# Altium PCB top.PcbDoc
Units mil, origin at the board's own origin, x right, y up, seen from the top; angles counter-clockwise.
Board outline 4650 x 4650 mil, 2 copper layers (Top Layer, Bottom Layer); 13 components, 9 nets, 93 pads, 32 vias.
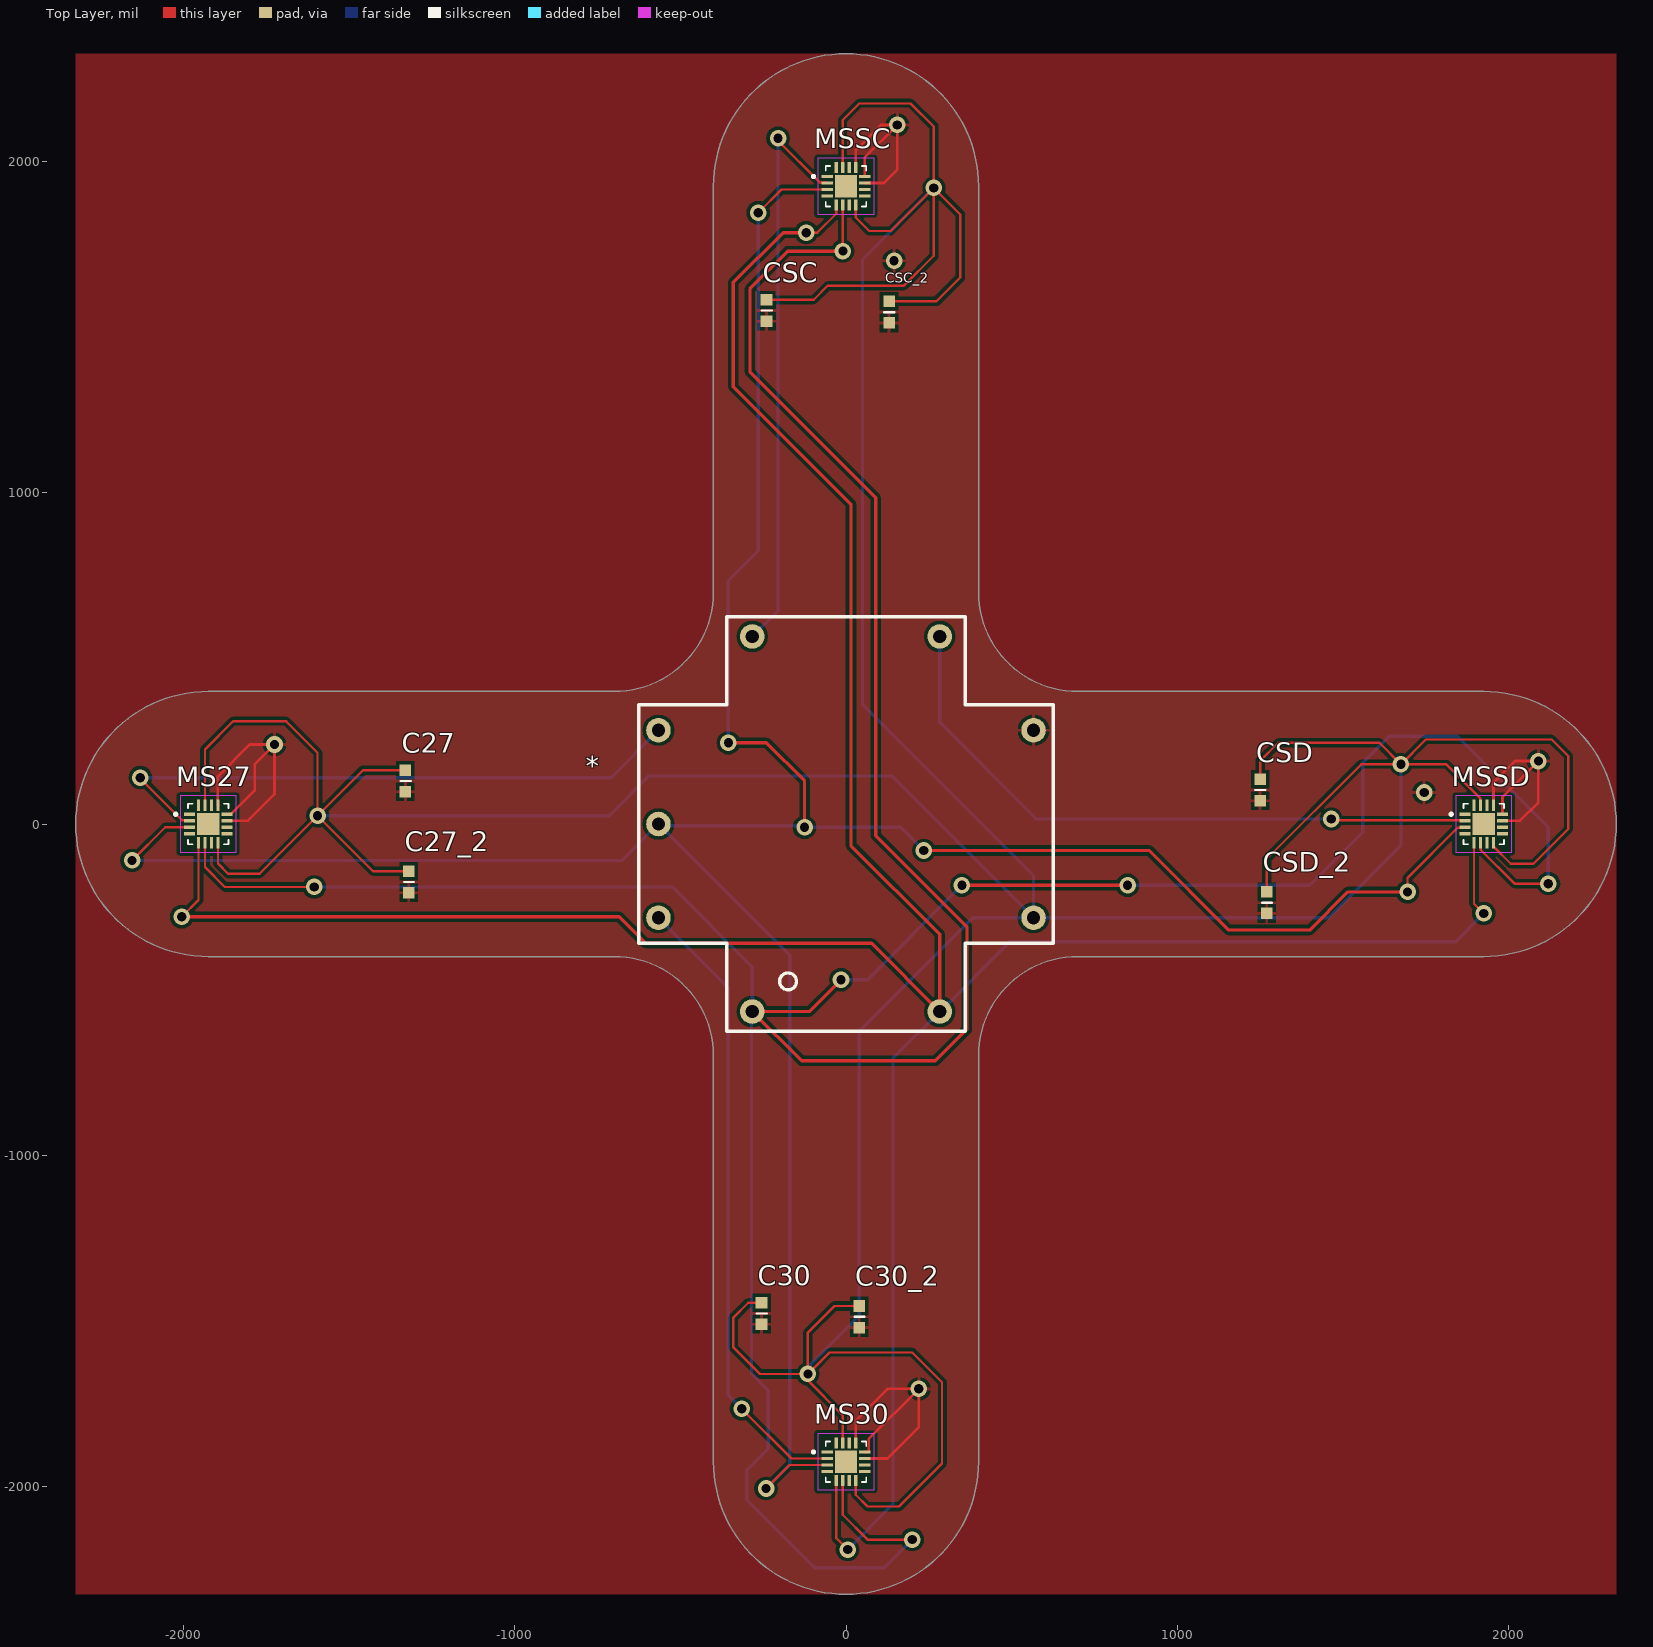
[diagram p0: Top Layer view]
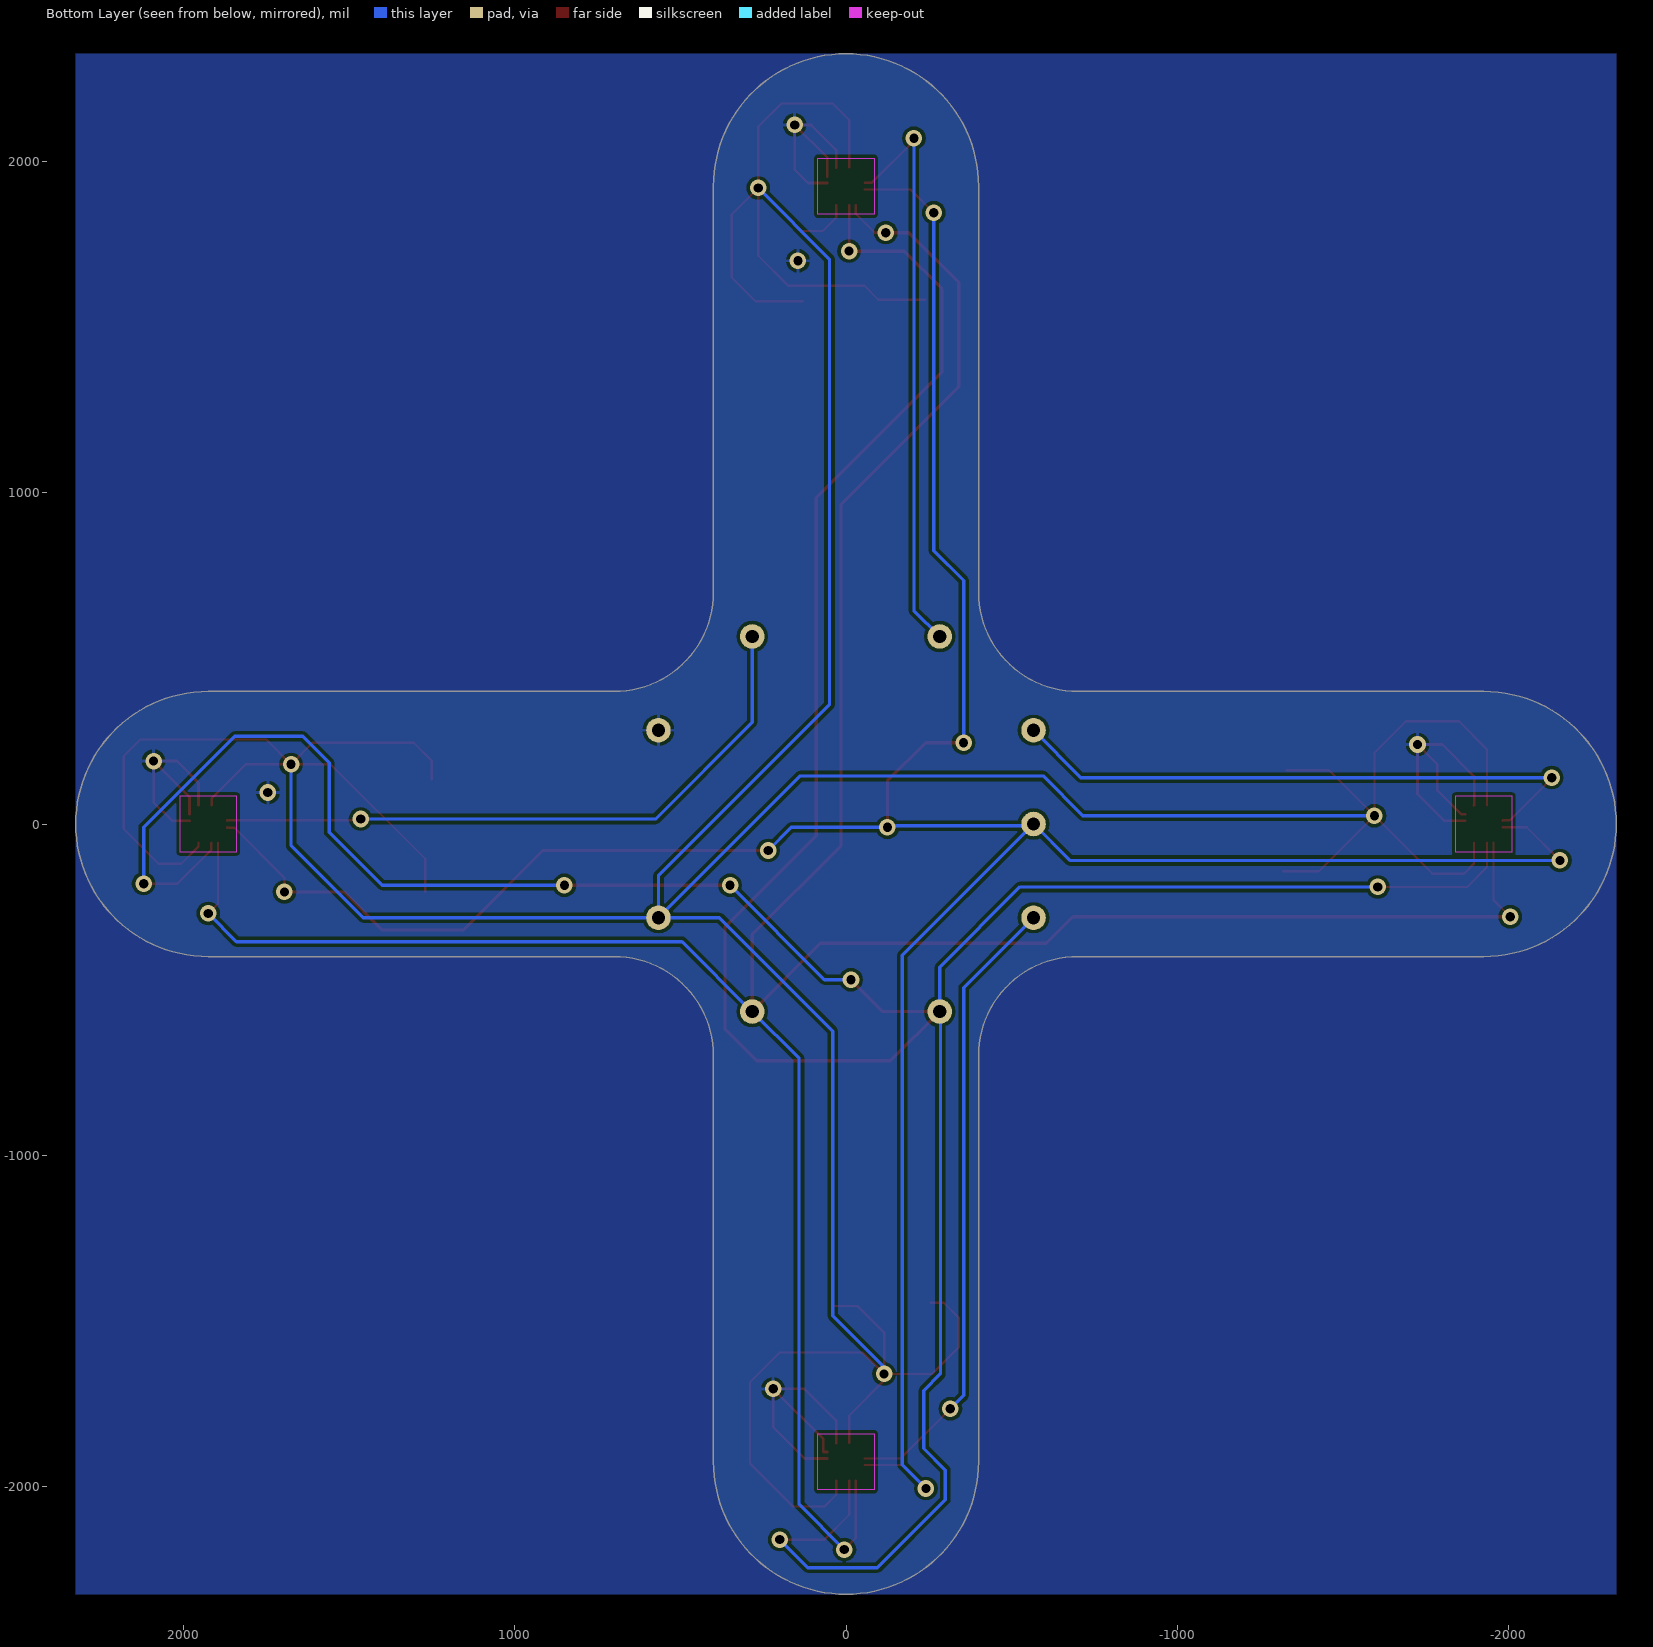
[diagram p1: Bottom Layer view, seen from below]
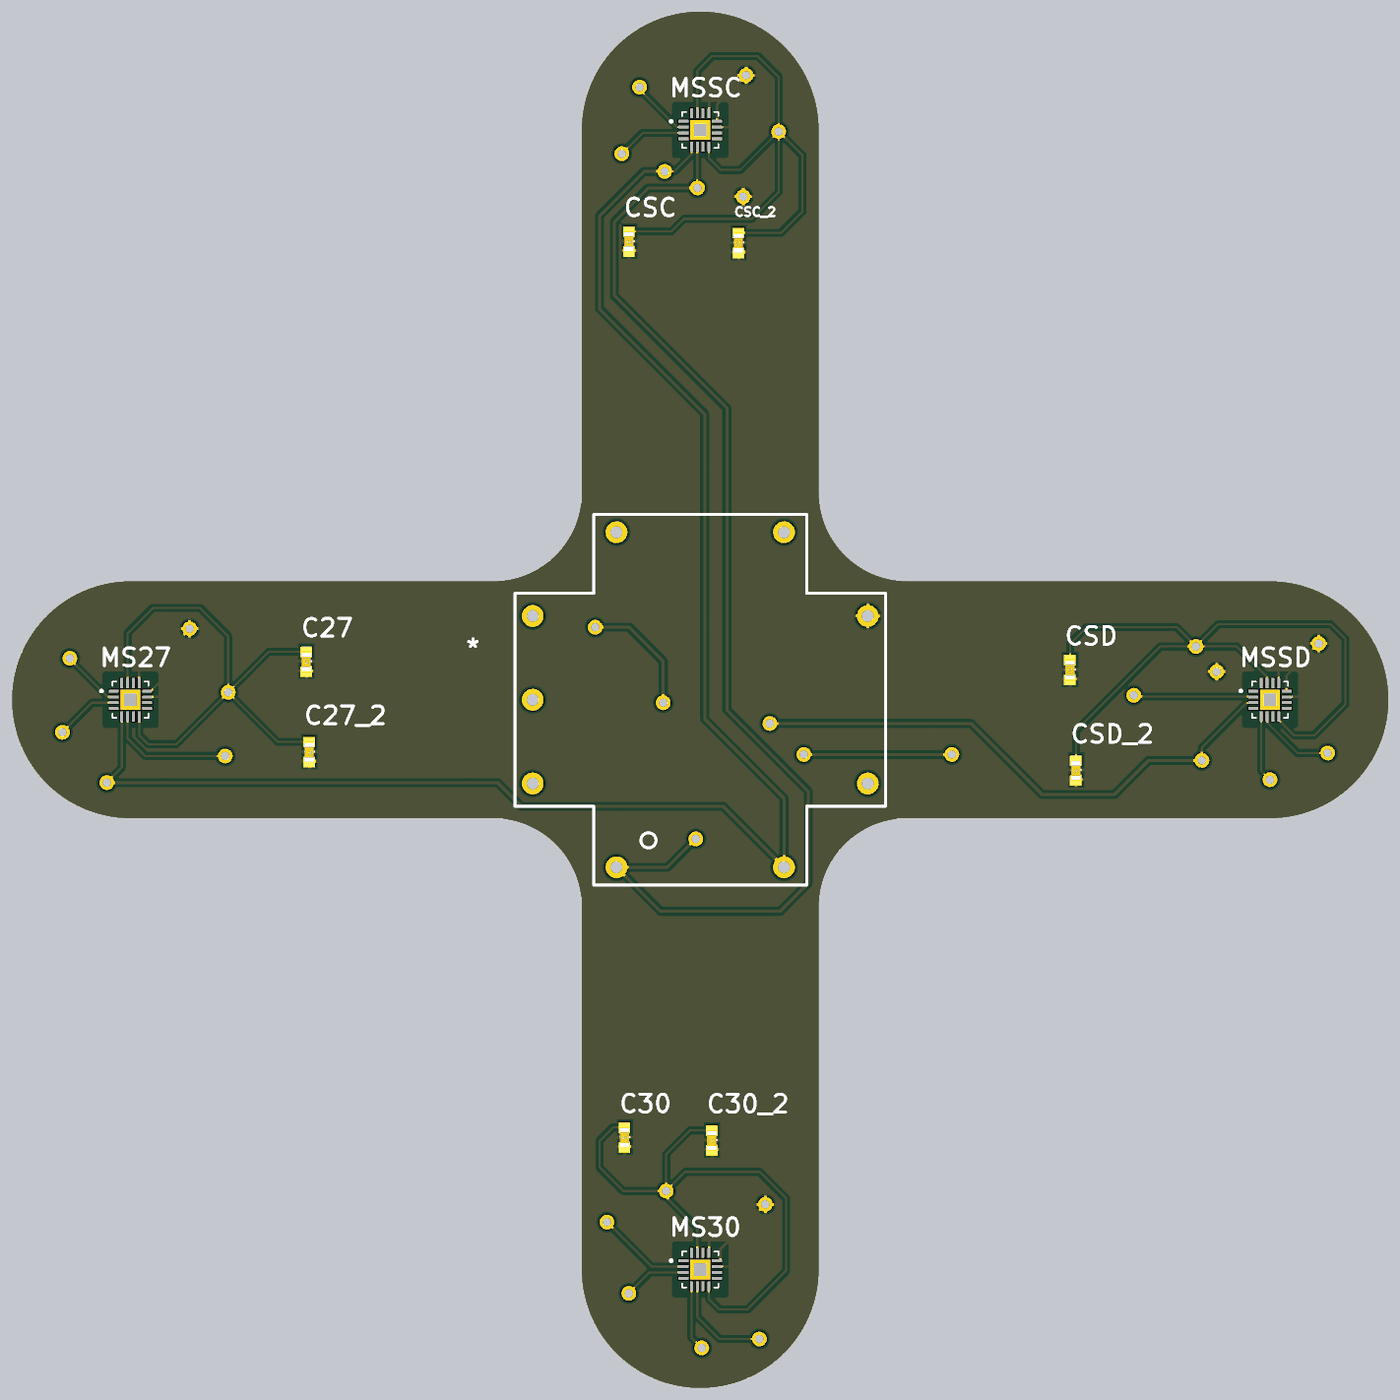
[diagram p2: 3D render of the assembled board from above, using the file's embedded part models]

## Layer stack, top to bottom
Top Solder: solder mask 0.4, Solder Resist, Dk 3.5
Top Layer: signal copper 1.4
Dielectric 1: dielectric 12.6, FR-4, Dk 4.8
Bottom Layer: signal copper 1.4
Bottom Solder: solder mask 0.4, Solder Resist, Dk 3.5

## Board outline
-400,-700 ccw(c-700,-700) -700,-400 -1925,-400 cw(c-1925,0) -1925,400 -700,400 ccw(c-700,700) -400,700 -400,1925 cw(c0,1925) 400,1925 400,700 ccw(c700,700) 700,400 1925,400 cw(c1925,0) 1925,-400 700,-400 ccw(c700,-700) 400,-700 400,-1925 cw(c0,-1925) -400,-1925

## Design rules (kind name [scope] priority, off if disabled: settings)
Clearance [All] p1: gap=10 ignorepadtopadclearanceinfootprint=FALSE except(0: Arc-Hole Track-Hole SMDPad-Hole THPad-Hole Via-Hole Fill-Hole Poly-Hole Region-Hole Text-Hole)
PolygonConnect [All] p1: connectstyle=Relief reliefconductorwidth=10 reliefentries=4 polygonreliefangle="90 Angle" airgapwidth=10
RoutingVias [All] p1: holewidth=28 width=50 viastyle="Through Hole" minholewidth=28 minwidth=50 maxholewidth=28 maxwidth=50
SolderMaskExpansion [All] p1: expansion=4 istentingtop=FALSE
Width [All] p1: maxlimit=10 minlimit=8 preferedwidth=10 toplayer_prefwidth=8 bottomlayer_minwidth=10 minimp=50.000000 maximp=50.000000 favimp=50.000000
30 further rules are at their usual default settings.

## Components (designator, comment, footprint, x,y, rotation, side; value= is the part's Value field where it differs from the comment)
* "PIN9_small" PIN9_small 0,0 r0 top
C27 "0.1uF" CAP_0603 -1330,130 r90 top
C27_2 "0.1uF" CAP_0603 -1320,-175 r90 top
C30 "0.1uF" CAP_0603 -255,-1477.5 r90 top
C30_2 "0.1uF" CAP_0603 40,-1487.5 r90 top
CSC "0.1uF" CAP_0603 -240,1550 r90 top
CSC_2 "0.1uF" CAP_0603 130,1545 r90 top
CSD "0.1uF" CAP_0603 1250,102.5 r90 top
CSD_2 "0.1uF" CAP_0603 1270,-237.5 r90 top
MS27 "MLX90393" MLX90393 -1925,0 r0 top
MS30 "MLX90393" MLX90393 0,-1925 r0 top
MSSC "MLX90393" MLX90393 0,1925 r0 top
MSSD "MLX90393" MLX90393 1925,0 r0 top

## Footprints (in the part's own frame and the unit in brackets; to place one, negate y for a bottom-side part, rotate by r counter-clockwise, add the part's x,y. Pads: shape width x height; smd on the part's side, far side on the other; paste and mask are expansions set on the pad)
CAP_0603 [mil]
  rect 35x35 smd: 1(-32.5,0) 2(32.5,0)
  silkscreen extent 0,-16 0,14, body extent -53,-18 49,21, height 35
MLX90393 [mm]
  rrect25% 0.86x0.26 smd: 1(-1.435,0.75) 2(-1.435,0.25) 3(-1.435,-0.25) 4(-1.435,-0.75) 9(1.435,-0.75) 10(1.435,-0.25) 11(1.435,0.25) 12(1.435,0.75)
  rrect25% 0.26x0.86 smd: 5(-0.75,-1.435) 6(-0.25,-1.435) 7(0.25,-1.435) 8(0.75,-1.435) 13(0.75,1.435) 14(0.25,1.435) 15(-0.25,1.435) 16(-0.75,1.435)
  rect 1.71x1.71 smd paste-2: 17(0,0)
  silkscreen extent -2.59,-1.55 1.55,1.55
PIN9_small [mil]
  round 74 hole 40: 1(-283,-566) 2(283,-566) 3(566,-283) 4(566,283) 5(283,566) 6(-283,566) 7(-566,283) 8(-566,0) 9(-566,-283)
  silkscreen extent -626,-626 626,626

## Part data
C27 C27_2 C30 C30_2 CSC CSC_2 CSD CSD_2: library part CAP, "capacitance"
MS27 MS30 MSSC MSSD: "sensor"

## Via types
v1: diameter 50, hole 28, Top Layer to Bottom Layer, 32 vias

## Nets (pads, with @x,y where several pads share a name; then routed paths per layer and width w, separated by ;. In a path a pad name is that pad's centre, name@x,y a point inside that pad or via, vN(x,y) a via of type N, cw(c..) or ccw(c..) an arc to the next point about the centre after c; other vN are vias at no path point)
GND: *.4 C27.1 C27_2.1 C30.1 C30_2.1 CSC.1 CSC_2.1 CSD.1 CSD_2.1 MS27.11 MS27.12 MS27.13 MS30.11 MS30.12 MS30.13 MSSC.11 MSSC.12 MSSC.13 MSSD.11 MSSD.12 MSSD.13 | length 3131
  Top Layer w8: MS27.13 -1896.04,57.06 -1896.04,143.96 -1800,240 v1(-1725,240) ; MS27.11 -1805.16,9.84 -1725,90 v1(-1725,240) ; MS27.12 -1856.69,29.53 -1785,101.22 -1785,180 v1(-1725,240) ; MS30.13 29.53,-1800.47 125,-1705 v1(220,-1705) ; MSSC.13 29.53,2034.53 105,2110 v1(155,2110) ; MS30.11 124.84,-1915.16 220,-1820 v1(220,-1705) ; MS30.12 67.03,-1895.47 68.15,-1894.35 68.15,-1856.85 v1(220,-1705) ; MSSC.11 114.84,1934.84 155,1975 v1(155,2110) ; MSSC.12 56.5,2011.5 v1(155,2110) ; MSSD.13 1954.53,124.53 2020,190 v1(2090,190) ; MSSD.11 2034.84,9.84 2090,65 v1(2090,190) ; MSSD.12 1981.5,81.5 v1(2090,190)
  other v1: 1745,95 145,1700
Net*_1: *.1 MS27.6 MS30.6 MSSC.6 MSSD.6 | length 11616.9
  Top Layer w7: MS27.6 -1934.84,-130.16 -1875,-190 v1(-1605,-190) ; MS30.6 -9.84,-2085.16 65,-2160 v1(200,-2160) ; MSSC.6 -9.84,1729.84 v1(-9.24,1729.24) ; MSSD.6 1916.22,-57.56 1916.22,-78.27 2017.96,-180 v1(2120,-180)
  Top Layer w10: v1(-15,-470) -111,-566 *.1 -134,-715 270,-715 365,-620 365,-310 90,-35 90,985 -290,1365 -290,1615 -175.76,1729.24 v1(-9.24,1729.24) ; v1(350,-185) v1(850,-185)
  Bottom Layer w10: v1(-1605,-190) -525,-190 -283,-432 *.1 -285,-568 -285,-1660 -235,-1710 -235,-1885 -300,-1950 -300,-2040 -95,-2245 115,-2245 v1(200,-2160) ; v1(-15,-470) 65,-470 v1(350,-185) ; v1(850,-185) 1400,-185 1560,-25 1560,185 1640,265 1845,265 2120,-10 v1(2120,-180)
Net*_2: *.2 MS27.5 MS30.5 MSSC.5 MSSD.5 | length 9484.8
  Top Layer w7: v1(-2005,-280) -1954.53,-229.53 MS27.5 ; v1(-120,1785) -86.78,1785 -29.53,1842.26 MSSC.5 ; MS30.5 -29.53,-2155.47 v1(5,-2190) ; MSSD.5 1895.47,-240.47 v1(1925,-270)
  Top Layer w10: v1(-2005,-280) -685,-280 -605,-360 77,-360 *.2 283,-333 15,-65 15,965 -340,1320 -340,1635 -190,1785 v1(-120,1785)
  Bottom Layer w10: v1(5,-2190) 141.7,-2053.3 141.7,-707.3 *.2 284,-566 495,-355 1840,-355 v1(1925,-270)
Net*_3: *.3 C27.2 C27_2.2 C30.2 C30_2.2 CSC.2 CSC_2.2 CSD.2 CSD_2.2 MS27.8 MS27.15 MS30.8 MS30.15 MSSC.8 MSSC.15 MSSD.8 MSSD.15 | length 16941.6
  Top Layer w7: MS27.15 -1934.84,225.16 -1850,310 -1690,310 -1595,215 v1(-1595,25) ; MS27.8 -1895.47,-119.53 -1865,-150 -1770,-150 v1(-1595,25) ; C27.2 -1457.5,162.5 v1(-1595,25) ; C27_2.2 -1427.5,-142.5 v1(-1595,25) ; C30.2 -295,-1445 -340,-1490 -340,-1580 -260,-1660 v1(-115,-1660) ; CSC.2 -97.5,1582.5 -55,1625 175,1625 265,1715 v1(265,1920) ; MS30.15 -9.84,-1785.16 -115,-1680 v1(-115,-1660) ; MSSC.15 -9.84,2125.16 40,2175 195,2175 265,2105 v1(265,1920) ; MS30.8 29.53,-2024.53 65,-2060 160,-2060 290,-1930 290,-1685 200,-1595 -50,-1595 v1(-115,-1660) ; MSSC.8 29.53,1830.47 70,1790 135,1790 v1(265,1920) ; C30_2.2 -35,-1455 -115,-1535 v1(-115,-1660) ; CSC_2.2 272.5,1577.5 345,1650 345,1840 v1(265,1920) ; CSD.2 1250,190 1305,245 1610,245 v1(1675,180) ; CSD_2.2 1270,-105 1555,180 v1(1675,180) ; MSSD.15 1914.09,57.56 1914.09,78.27 1812.36,180 v1(1675,180) ; MSSD.8 1954.53,-68.31 2006.22,-120 2075,-120 2180,-15 2180,205 2130,255 1750,255 v1(1675,180)
  Bottom Layer w10: v1(-1595,25) -715,25 -595,145 138,145 *.3 ; v1(-115,-1660) -115,-1640 40,-1485 40,-625 382,-283 *.3 ; v1(265,1920) 50,1705 50,360 566,-156 *.3 ; v1(1675,180) 1675,-65 1457,-283 *.3
Net*_5: *.5 MSSD.2 | length 1967.6
  Top Layer w7: v1(1465,15) 1469.09,10.91 1867.44,10.91 MSSD.2
  Bottom Layer w10: *.5 283,307 575,15 v1(1465,15)
Net*_6: *.6 MSSC.2 | length 1745.1
  Top Layer w7: v1(-205,2070) -205,2062.64 -78.27,1935.91 -57.56,1935.91 MSSC.2
  Bottom Layer w10: *.6 -205,644 v1(-205,2070)
Net*_7: *.7 MS27.2 | length 1827
  Top Layer w7: v1(-2130,140) -2130,137.64 -2003.27,10.91 -1982.56,10.91 MS27.2
  Bottom Layer w10: v1(-2130,140) -709,140 *.7
Net*_8: *.8 MS27.3 MS30.3 MSSC.3 MSSD.3 | length 9268.7
  Top Layer w7: v1(-2155,-110) -2054.84,-9.84 MS27.3 ; v1(-265,1845) -194.84,1915.16 MSSC.3 ; v1(-241.24,-2005.73) -170.35,-1934.84 MS30.3 ; v1(1695,-205) 1695,-162.64 1846.73,-10.91 1867.44,-10.91 MSSD.3
  Top Layer w10: v1(-355,245) -240,245 -125,130 v1(-125,-10) ; v1(235,-80) 915,-80 1155,-320 1400,-320 1515,-205 v1(1695,-205)
  Bottom Layer w10: v1(-2155,-110) -676,-110 *.8 *.8@-561,-5 ; v1(-355,245) -355,735 -265,825 v1(-265,1845) ; v1(-241.24,-2005.73) -170,-1934.49 -170,-396 *.8@-561,-5 ; v1(235,-80) 165,-10 v1(-125,-10) -130,-5 *.8@-561,-5
Net*_9: *.9 MS30.2 | length 1906.7
  Top Layer w7: v1(-315,-1765) -164.84,-1915.16 MS30.2
  Bottom Layer w10: *.9 -355,-494 -355,-1725 v1(-315,-1765)
pads on no net: MS27.1 MS27.4 MS27.7 MS27.9 MS27.10 MS27.14 MS27.16 MS27.17 MS30.1 MS30.4 MS30.7 MS30.9 MS30.10 MS30.14 MS30.16 MS30.17 MSSC.1 MSSC.4 MSSC.7 MSSC.9 MSSC.10 MSSC.14 MSSC.16 MSSC.17 MSSD.1 MSSD.4 MSSD.7 MSSD.9 MSSD.10 MSSD.14 MSSD.16 MSSD.17

## Polygon pours and split planes (outlines as drawn)
GND on Bottom Layer "GND_L02_P000" (solid, remove dead copper, pour order 0): -2325,-2325 -2325,2325 2325,2325 2325,-2325
GND on Top Layer "GND_L01_P001" (solid, remove dead copper, pour order 1): -2325,-2325 -2325,2325 2325,2325 2325,-2325

## Keep-outs
Top Layer:
  rectangle: 1840,-85 2010,85
  rectangle: -85,1840 85,2010
  rectangle: -85,-2010 85,-1840
  rectangle: -2010,-85 -1840,85
Bottom Layer:
  rectangle: 1840,-85 2010,85
  rectangle: -85,-2010 85,-1840
  rectangle: -85,1840 85,2010
  rectangle: -2010,-85 -1840,85

## Silkscreen, mask and mechanical layers (free items; w line width, h text height)
Mechanical 1:
  the board outline again, w10